# EAGLE board CT_schematic (EAGLE 7.6.0)

Size 100 x 80 mm. Coordinates in mm from the lower left corner, seen from the top.
Outline: 0,0 100,0 100,80 0,80 0,0
Copper layers (1*16): Top 0.035mm / dielectric 1.5mm / Bottom 0.035mm
Design rules "default": minimum track width 10mil, minimum drill 24mil, track to track 8mil, track to pad 8mil, pad to pad 8mil, via to via 8mil, smd to smd 8mil, copper to edge 40mil, drill to drill 8mil, minimum pad ring 10mil, minimum via ring 8mil, stop-mask expansion 4mil, vias tented up to drill 0mil, thermal gap 10mil

## Footprints (pad centres in the part's own frame; a part is rotated, then mirrored left to right if it is on the bottom)
C0603 = smd 0.8 x 0.8: 1 -0.762,0; 2 0.762,0
C0402 = smd 0.5 x 0.5: 1 -0.508,0; 2 0.508,0
C1210 = smd 1.2 x 2.5: 1 -1.524,0; 2 1.524,0
C0805 = smd 1.2 x 1.3: 1 -1.016,0; 2 1.016,0
C1206 = smd 1.3 x 1.6: 1 -1.524,0; 2 1.524,0
L0806 = smd 1.016 x 1.524: 1 -0.889,0; 2 0.889,0
R0603 = smd 0.8 x 0.8: 1 -0.762,0; 2 0.762,0
UFBGA64 = smd 0.2 x 0.2: A1 -1.75,1.75; A2 -1.25,1.75; A3 -0.75,1.75; A4 -0.25,1.75; A5 0.25,1.75; A6 0.75,1.75; A7 1.25,1.75; A8 1.75,1.75; B1 -1.75,1.25; B2 -1.25,1.25; B3 -0.75,1.25; B4 -0.25,1.25; B5 0.25,1.25; B6 0.75,1.25; B7 1.25,1.25; B8 1.75,1.25; C1 -1.75,0.75; C2 -1.25,0.75; C3 -0.75,0.75; C4 -0.25,0.75; C5 0.25,0.75; C6 0.75,0.75; C7 1.25,0.75; C8 1.75,0.75; D1 -1.75,0.25; D2 -1.25,0.25; D3 -0.75,0.25; D4 -0.25,0.25; D5 0.25,0.25; D6 0.75,0.25; D7 1.25,0.25; D8 1.75,0.25; E1 -1.75,-0.25; E2 -1.25,-0.25; E3 -0.75,-0.25; E4 -0.25,-0.25; E5 0.25,-0.25; E6 0.75,-0.25; E7 1.25,-0.25; E8 1.75,-0.25; F1 -1.75,-0.75; F2 -1.25,-0.75; F3 -0.75,-0.75; F4 -0.25,-0.75; F5 0.25,-0.75; F6 0.75,-0.75; F7 1.25,-0.75; F8 1.75,-0.75; G1 -1.75,-1.25; G2 -1.25,-1.25; G3 -0.75,-1.25; G4 -0.25,-1.25; G5 0.25,-1.25; G6 0.75,-1.25; G7 1.25,-1.25; G8 1.75,-1.25; H1 -1.75,-1.75; H2 -1.25,-1.75; H3 -0.75,-1.75; H4 -0.25,-1.75; H5 0.25,-1.75; H6 0.75,-1.75; H7 1.25,-1.75; H8 1.75,-1.75
TFBGA-153 = smd 0.3 x 0.3: A1 -3.25,3.25; A2 -2.75,3.25; A3 -2.25,3.25; A4 -1.75,3.25; A5 -1.25,3.25; A6 -0.75,3.25; A7 -0.25,3.25; A8 0.25,3.25; A9 0.75,3.25; A10 1.25,3.25; A11 1.75,3.25; A12 2.25,3.25; A13 2.75,3.25; A14 3.25,3.25; B1 -3.25,2.75; B2 -2.75,2.75; B3 -2.25,2.75; B4 -1.75,2.75; B5 -1.25,2.75; B6 -0.75,2.75; B7 -0.25,2.75; B8 0.25,2.75; B9 0.75,2.75; B10 1.25,2.75; B11 1.75,2.75; B12 2.25,2.75; B13 2.75,2.75; B14 3.25,2.75; C1 -3.25,2.25; C2 -2.75,2.25; C3 -2.25,2.25; C4 -1.75,2.25; C5 -1.25,2.25; C6 -0.75,2.25; C7 -0.25,2.25; C8 0.25,2.25; C9 0.75,2.25; C10 1.25,2.25; C11 1.75,2.25; C12 2.25,2.25; C13 2.75,2.25; C14 3.25,2.25; D1 -3.25,1.75; D2 -2.75,1.75; D3 -2.25,1.75; D4 -1.75,1.75; D12 2.25,1.75; D13 2.75,1.75; D14 3.25,1.75; E1 -3.25,1.25; E2 -2.75,1.25; E3 -2.25,1.25; E5 -1.25,1.25; E6 -0.75,1.25; E7 -0.25,1.25; E8 0.25,1.25; E9 0.75,1.25; E10 1.25,1.25; E12 2.25,1.25; E13 2.75,1.25; E14 3.25,1.25; F1 -3.25,0.75; F2 -2.75,0.75; F3 -2.25,0.75; F5 -1.25,0.75; F10 1.25,0.75; F12 2.25,0.75; F13 2.75,0.75; F14 3.25,0.75; G1 -3.25,0.25; G2 -2.75,0.25; G3 -2.25,0.25; G5 -1.25,0.25; G10 1.25,0.25; G12 2.25,0.25; G13 2.75,0.25; G14 3.25,0.25; H1 -3.25,-0.25; H2 -2.75,-0.25; H3 -2.25,-0.25; H5 -1.25,-0.25; H10 1.25,-0.25; H12 2.25,-0.25; H13 2.75,-0.25; H14 3.25,-0.25; J1 -3.25,-0.75; J2 -2.75,-0.75; J3 -2.25,-0.75; J5 -1.25,-0.75; J10 1.25,-0.75; J12 2.25,-0.75; J13 2.75,-0.75; J14 3.25,-0.75; K1 -3.25,-1.25; K2 -2.75,-1.25; K3 -2.25,-1.25; K5 -1.25,-1.25; K6 -0.75,-1.25; K7 -0.25,-1.25; K8 0.25,-1.25; K9 0.75,-1.25; K10 1.25,-1.25; K12 2.25,-1.25; K13 2.75,-1.25; K14 3.25,-1.25; L1 -3.25,-1.75; L2 -2.75,-1.75; L3 -2.25,-1.75; L12 2.25,-1.75; L13 2.75,-1.75; L14 3.25,-1.75; M1 -3.25,-2.25; M2 -2.75,-2.25; M3 -2.25,-2.25; M4 -1.75,-2.25; M5 -1.25,-2.25; M6 -0.75,-2.25; M7 -0.25,-2.25; M8 0.25,-2.25; M9 0.75,-2.25; M10 1.25,-2.25; M11 1.75,-2.25; M12 2.25,-2.25; M13 2.75,-2.25; M14 3.25,-2.25; N1 -3.25,-2.75; N2 -2.75,-2.75; N3 -2.25,-2.75; N4 -1.75,-2.75; N5 -1.25,-2.75; N6 -0.75,-2.75; N7 -0.25,-2.75; N8 0.25,-2.75; N9 0.75,-2.75; N10 1.25,-2.75; N11 1.75,-2.75; N12 2.25,-2.75; N13 2.75,-2.75; N14 3.25,-2.75; P1 -3.25,-3.25; P2 -2.75,-3.25; P3 -2.25,-3.25; P4 -1.75,-3.25; P5 -1.25,-3.25; P6 -0.75,-3.25; P7 -0.25,-3.25; P8 0.25,-3.25; P9 0.75,-3.25; P10 1.25,-3.25; P11 1.75,-3.25; P12 2.25,-3.25; P13 2.75,-3.25; P14 3.25,-3.25
SMD-8 = smd 0.72 x 0.6: 1 -1.45,-0.7; 2 -0.485,-0.7; 3 0.485,-0.7; 4 1.455,-0.7; 5 1.455,0.7; 6 0.485,0.7; 7 -0.485,0.7; 8 -1.455,0.7
QFN-28 = smd 0.813 x 0.305: 1 -2.451,1.5; 2 -2.451,1; 3 -2.451,0.5; 4 -2.451,0; 5 -2.451,-0.5; 6 -2.451,-1; 7 -2.451,-1.5; 15 2.451,-1.5; 16 2.451,-1; 17 2.451,-0.5; 18 2.451,0; 19 2.451,0.5; 20 2.451,1; 21 2.451,1.5 | smd 0.305 x 0.813: 8 -1.5,-2.451; 9 -1,-2.451; 10 -0.5,-2.451; 11 0,-2.451; 12 0.5,-2.451; 13 1,-2.451; 14 1.5,-2.451; 22 1.5,2.451; 23 1,2.451; 24 0.5,2.451; 25 0,2.451; 26 -0.5,2.451; 27 -1,2.451; 28 -1.5,2.451 | smd 3.607 x 3.607: 29 0,0
SJ-43515TS-SMT-TR = smd 2.2 x 3: 1 0.6,-7.4; 4 3.4,-7.4 | smd 3 x 3: 2 12.8,-7.4; 5 17,-3 | smd 2 x 3: 3 5.3,0; 6 2.5,0 | drill 1.8: P$7 4.5,-3.69; P$8 11.54,-3.69
ABLS-12.288MHZ-B4-T = smd 5.6 x 2.8: 1 -3.81,0; 2 5.69,0
ASEK = smd 1.4 x 1: 1 -1.1,-0.8; 2 1.1,-0.8; 3 1.1,0.8; 4 -1.1,0.8
ASFL1 = smd 1.7 x 1.5: 1 -1.27,-1.1; 2 1.27,-1.1; 3 1.27,1.1; 4 -1.27,1.1
TSOT-23-5 = smd 1.3 x 0.62: 1 -1.31,0.95; 2 -1.31,0; 3 -1.31,-0.95; 4 1.31,-0.95; 5 1.31,0.95
DFN8_2X3MC = smd 0.813 x 0.305: 1 -1.398,0.75; 2 -1.398,0.25; 3 -1.398,-0.25; 4 -1.398,-0.75; 5 1.398,-0.75; 6 1.398,-0.25; 7 1.398,0.25; 8 1.398,0.75 | smd 1.753 x 1.549: 9 0,0
JST-2-SMD = smd 1 x 4.6: 1 -1,-3.7; 2 1,-3.7 | smd 1.6 x 3.4: NC1 -3.4,1.5; NC2 3.4,1.5
FCI_10118193-0001LF = smd 0.4 x 1.35: 1 -1.3,2.675; 2 -0.65,2.675; 3 0,2.675; 4 0.65,2.675; 5 1.3,2.675 | smd 1.6 x 1.4: 6 -3.2,2.45; 7 3.2,2.45 | smd 1.9 x 1.9: 8 -1.2,0; 9 1.2,0 | hole 0.5: -3.3,0; 3.3,0
SON-6 = smd 0.55 x 0.3: 1 -0.355,0.5 | smd 0.52 x 0.3: 2 -0.37,0; 3 -0.37,-0.5; 4 0.37,-0.5; 5 0.37,0; 6 0.37,0.5
SW_4-1437565-2 = smd 1.4 x 2.1: 1 -2.23,4.55; 2 -2.23,-4.55; 3 2.23,4.55; 4 2.23,-4.55
LGM67K-G1J2-24-Z = smd 0.8 x 1.4: A -2,0; C 0,0
NC7SZ125M5X = smd 1.3 x 0.7: 1 -1.3,0.95; 2 -1.3,0; 3 -1.3,-0.95; 4 1.3,-0.95; 5 1.3,0.95
DUMMY_PACKAGE_207 = drill 0.3: 1 0,-1; 2 1.5,-1; 3 3,-1

## Placement (x,y rotation side)
C1  1e-06  [C0603]  -30.48,68.58 0 top  (outside the outline)
C2  1e-07  [C0603]  -34.29,68.58 0 top  (outside the outline)
C3  1e-07  [C0603]  -38.1,68.58 0 top  (outside the outline)
C4  1e-07  [C0603]  -41.91,68.58 0 top  (outside the outline)
C5  1e-07  [C0603]  -45.72,68.58 0 top  (outside the outline)
C6  1e-07  [C0603]  -49.53,68.58 0 top  (outside the outline)
C7  4.7e-06  [C0603]  -15.24,68.58 0 top  (outside the outline)
C8  1e-08  [C0603]  -53.34,68.58 0 top  (outside the outline)
C9  1e-06  [C0603]  -57.15,68.58 0 top  (outside the outline)
C10  1e-07  [C0402]  -50.8,73.66 0 top  (outside the outline)
C11  2.2e-06  [C0603]  -19.05,68.58 0 top  (outside the outline)
C12  2.2e-06  [C0603]  -22.86,68.58 0 top  (outside the outline)
C13  1e-07  [C0402]  -54.61,73.66 0 top  (outside the outline)
C14  1e-07  [C0402]  -58.42,73.66 0 top  (outside the outline)
C15  2.2e-06  [C0603]  -26.67,68.58 0 top  (outside the outline)
C16  1e-06  [C0603]  -60.96,68.58 0 top  (outside the outline)
C17  1e-06  [C0603]  -64.77,68.58 0 top  (outside the outline)
C18  2.2e-05  [C1210]  -57.15,44.45 0 top  (outside the outline)
C19  2.2e-05  [C1210]  -63.5,44.45 0 top  (outside the outline)
C20  1e-09  [C0402]  -62.23,73.66 0 top  (outside the outline)
C21  1e-09  [C0402]  -66.04,73.66 0 top  (outside the outline)
C22  1e-07  [C0402]  -69.85,73.66 0 top  (outside the outline)
C23  1e-07  [C0402]  -73.66,73.66 0 top  (outside the outline)
C24  1e-07  [C0402]  -15.24,78.74 0 top  (outside the outline)
C25  1e-07  [C0402]  -19.05,78.74 0 top  (outside the outline)
C26  1e-07  [C0402]  -22.86,78.74 0 top  (outside the outline)
C27  1e-05  [C0805]  -46.99,52.07 0 top  (outside the outline)
C28  1e-05  [C0805]  -52.07,52.07 0 top  (outside the outline)
C29  1e-05  [C0805]  -57.15,52.07 0 top  (outside the outline)
C30  1e-05  [C0805]  -62.23,52.07 0 top  (outside the outline)
C31  1e-05  [C0805]  -67.31,52.07 0 top  (outside the outline)
C32  2.2e-11  [C0402]  -43.18,73.66 0 top  (outside the outline)
C33  2.2e-11  [C0402]  -46.99,73.66 0 top  (outside the outline)
C34  1e-08  [C0402]  -26.67,78.74 0 top  (outside the outline)
C35  1e-08  [C0402]  -30.48,78.74 0 top  (outside the outline)
C36  1e-05  [C0805]  -72.39,52.07 0 top  (outside the outline)
C37  1e-05  [C0805]  -15.24,58.42 0 top  (outside the outline)
C38  1e-07  [C0402]  -34.29,78.74 0 top  (outside the outline)
C39  1e-05  [C1206]  -69.85,44.45 0 top  (outside the outline)
C40  1e-05  [C1206]  -16.51,52.07 0 top  (outside the outline)
C41  1e-08  [C0402]  -38.1,78.74 0 top  (outside the outline)
C42  1e-08  [C0402]  -41.91,78.74 0 top  (outside the outline)
I1  3.3e-06  [L0806]  -22.86,52.07 0 top  (outside the outline)
R2  1000.0  [R0603]  -68.58,68.58 0 top  (outside the outline)
R4  4700.0  [R0603]  -72.39,68.58 0 top  (outside the outline)
R5  4700.0  [R0603]  -15.24,73.66 0 top  (outside the outline)
R6  2200.0  [R0603]  -19.05,73.66 0 top  (outside the outline)
R7  2200.0  [R0603]  -22.86,73.66 0 top  (outside the outline)
R8  10000.0  [R0603]  -48.26,58.42 0 top  (outside the outline)
R9  34000.0  [R0603]  -53.34,58.42 0 top  (outside the outline)
R10  34000.0  [R0603]  -58.42,58.42 0 top  (outside the outline)
R11  34000.0  [R0603]  -63.5,58.42 0 top  (outside the outline)
R12  34000.0  [R0603]  -68.58,58.42 0 top  (outside the outline)
R13  34000.0  [R0603]  -73.66,58.42 0 top  (outside the outline)
R14  34000.0  [R0603]  -15.24,63.5 0 top  (outside the outline)
R15  34000.0  [R0603]  -20.32,63.5 0 top  (outside the outline)
R16  34000.0  [R0603]  -25.4,63.5 0 top  (outside the outline)
R17  34000.0  [R0603]  -30.48,63.5 0 top  (outside the outline)
R18  34000.0  [R0603]  -35.56,63.5 0 top  (outside the outline)
R19  10000.0  [R0603]  -40.64,63.5 0 top  (outside the outline)
R20  22.0  [R0603]  -26.67,73.66 0 top  (outside the outline)
R21  47000.0  [R0603]  -45.72,63.5 0 top  (outside the outline)
R22  47000.0  [R0603]  -50.8,63.5 0 top  (outside the outline)
R23  47000.0  [R0603]  -55.88,63.5 0 top  (outside the outline)
R24  680.0  [R0603]  -30.48,73.66 0 top  (outside the outline)
R25  220000.0  [R0603]  -33.02,58.42 0 top  (outside the outline)
R26  1000000.0  [R0603]  -27.94,58.42 0 top  (outside the outline)
R27  10000.0  [R0603]  -60.96,63.5 0 top  (outside the outline)
R28  10000.0  [R0603]  -66.04,63.5 0 top  (outside the outline)
R29  9100.0  [R0603]  -34.29,73.66 0 top  (outside the outline)
R30  680000.0  [R0603]  -38.1,58.42 0 top  (outside the outline)
R31  120000.0  [R0603]  -43.18,58.42 0 top  (outside the outline)
R32  2000.0  [R0603]  -38.1,73.66 0 top  (outside the outline)
R33  10000.0  [R0603]  -71.12,63.5 0 top  (outside the outline)
U1  STM32L431RBI6  [UFBGA64]  -24.13,36.83 0 top  (outside the outline)
U2  mtfc4gmcdm  [TFBGA-153]  -20.32,8.89 0 top  (outside the outline)
U3  TMD27711  [SMD-8]  -41.91,52.07 0 top  (outside the outline)
U4  WM8731CLSEFL  [QFN-28]  -49.53,45.72 0 top  (outside the outline)
U5  SJ-43515TS-SMT-TR  [SJ-43515TS-SMT-TR]  -53.34,10.16 0 top  (outside the outline)
U6  SJ-43515TS-SMT-TR  [SJ-43515TS-SMT-TR]  -39.37,26.67 0 top  (outside the outline)
U7  ABLS-12.288MHZ-B4-T  [ABLS-12.288MHZ-B4-T]  -25.4,45.72 0 top  (outside the outline)
U8  ASEK-32.768KHz-ECST  [ASEK]  -72.39,35.56 0 top  (outside the outline)
U9  ASFL1-25MHZ-NCS  [ASFL1]  -41.91,36.83 0 top  (outside the outline)
U10  ltc3406es5  [TSOT-23-5]  -20.32,57.15 0 top  (outside the outline)
U11  MCP73831T-2ACI/MC  [DFN8_2X3MC]  -57.15,77.47 0 top  (outside the outline)
U12  S2B-PH-SM4-TB(LF)(SN)  [JST-2-SMD]  -69.85,24.13 0 top  (outside the outline)
U13  10118193-0001LF  [FCI_10118193-0001LF]  -50.8,35.56 0 top  (outside the outline)
U14  TPS3895ADRYR  [SON-6]  -50.8,77.47 0 top  (outside the outline)
U15  4-1437565-2  [SW_4-1437565-2]  -55.88,24.13 0 top  (outside the outline)
U16  Q65110A2395  [LGM67K-G1J2-24-Z]  -36.83,44.45 0 top  (outside the outline)
U17  nc7sz125m5x  [NC7SZ125M5X]  -27.94,52.07 0 top  (outside the outline)
U18  nc7sz125m5x  [NC7SZ125M5X]  -34.29,52.07 0 top  (outside the outline)
U19  Dummy  [DUMMY_PACKAGE_207]  -48.26,78.74 0 top  (outside the outline)

## Library data of the parts
C1-C42 I1 R2 R4-R33 U1-U19 = circuit_tree

## Nets
CLK_CRYSTAL_U4_1: C32.1 U4.1 U7.1
CLK_CRYSTAL_U4_2: C33.1 U4.2 U7.2
CLK_U1_A1: U1.A1 U8.3
CLK_U1_C1: U1.C1 U9.3
GND: C1.2 C2.2 C3.2 C4.2 C5.2 C6.2 C7.2 C8.2 C9.2 C10.2 C11.2 C12.2 C13.2 C14.2 C15.2 C16.2 C17.2 C21.2 C22.2 C23.2 C24.2 C25.2 C26.2 C27.2 C28.2 C29.2 C30.2 C31.2 C32.2 C33.2 C34.2 C35.2 C36.2 C37.1 C37.2 C38.2 C39.2 C40.2 C41.2 C42.2 R2.2 R8.2 R21.2 R22.2 R23.2 R25.2 R29.2 R31.2 R32.2 U1.C2 U1.D4 U1.D5 U1.D6 U1.F1 U2.C4 U2.E7 U2.G5 U2.H10 U2.K8 U2.N2 U2.N5 U2.P4 U2.P6 U3.3 U4.4 U4.15 U4.19 U4.25 U4.26 U4.29 U5.1 U6.1 U8.2 U9.2 U10.2 U11.6 U11.9 U12.2 U13.5 U13.6 U13.7 U13.8 U13.9 U14.2 U16.C U17.1 U17.3 U18.1 U18.3 U19.1
INPUT_USBPOWER_5V: C39.1 R33.2 U11.1 U11.2 U13.1
NET_U1_B4: R8.1 U1.B4
NET_U1_C3: R7.1 U1.C3 U3.8
NET_U1_C7: R6.1 U1.C7 U3.2
NET_U1_E1: R5.1 U1.E1 U18.4
NET_U1_H6: U16.A
NET_U1_H7: U15.3 U15.4
NET_U2_C2: C12.1 C13.1 U2.C2
NET_U2_K5: R4.1 U2.K5 U17.4
NET_U3_4: C17.1 R20.1 U3.4
NET_U3_5: U3.5
NET_U3_6: U3.6
NET_U3_7: R19.1 U3.7
NET_U4_9: U4.9
NET_U4_20: C26.1 C31.1 U4.20
NET_U5_2: C19.1 R22.1 U5.2
NET_U5_5: C18.1 R21.1 U5.5
NET_U5_13: C18.2
NET_U5_14: C19.2
NET_U6_5: C20.1 C21.1 R23.1 R24.1 U6.5
NET_U6_21: R24.2
NET_U6_22: C20.2
NET_U10_1: U10.1
NET_U10_3: I1.1 U10.3
NET_U10_5: R25.1 R26.1 U10.5
NET_U10_ATNET_3: I1.2 R26.2
NET_U11_5: R33.1 U11.5
NET_U11_8: R32.1 U11.8
NET_U14_1: R28.1 R29.1 U14.1
NET_U14_3: R30.2 R31.1 U14.3
NET_U14_4: R27.1 U14.4 U17.2 U18.2
NET_U15_1: R2.1 U15.1 U15.2
PROC_ADC1_IN1: U1.E3 U19.3
PROC_ADC1_IN2: U1.E2 U19.2
PROC_SAI1_FS_A: U1.H8 U4.9 U4.11
PROC_SAI1_SCK_A: U1.D7 U4.7
PROC_SAI1_SD_A: U1.C6 U4.8
PROC_SDMMC1_CK: R18.1 U1.C5 U2.M6
PROC_SDMMC1_CMD: R17.1 U1.B5 U2.M5
PROC_SDMMC1_D0: R9.1 U1.E8 U2.A3
PROC_SDMMC1_D1: R10.1 U1.D8 U2.A4
PROC_SDMMC1_D2: R11.1 U1.B7 U2.A5
PROC_SDMMC1_D3: R12.1 U1.B6 U2.B2
PROC_SDMMC1_D4: R13.1 U1.B3 U2.B3
PROC_SDMMC1_D5: R14.1 U1.A3 U2.B4
PROC_SDMMC1_D6: R15.1 U1.F6 U2.B5
PROC_SDMMC1_D7: R16.1 U1.E7 U2.B6
VCC_S1_3V7: C36.1 C40.1 U10.4 U11.3 U11.4 U12.1
VCC_TIER1_3V3: C1.1 C2.1 C3.1 C4.1 C5.1 C6.1 C7.1 C8.1 C9.1 C10.1 C11.1 C14.1 C15.1 C16.1 C22.1 C23.1 C24.1 C25.1 C27.1 C28.1 C29.1 C30.1 C34.1 C35.1 C37.2 C38.1 C41.1 C42.1 I1.2 R4.2 R5.2 R6.2 R7.2 R9.2 R10.2 R11.2 R12.2 R13.2 R14.2 R15.2 R16.2 R17.2 R18.2 R19.2 R20.2 R26.2 R27.2 R28.2 R30.1 U1.B2 U1.D2 U1.E4 U1.E5 U1.E6 U1.H1 U2.C6 U2.E6 U2.F5 U2.J10 U2.K9 U2.M4 U2.N4 U2.P3 U2.P5 U3.1 U4.3 U4.5 U4.12 U4.18 U8.4 U9.4 U14.6 U17.5 U18.5

## Tracks (layer width: path | path; a pad name or v marks a point on that pad's centre or on a via)
CLK_CRYSTAL_U4_1  (2 unrouted)
CLK_CRYSTAL_U4_2  (2 unrouted)
CLK_U1_A1  (1 unrouted)
CLK_U1_C1  (1 unrouted)
GND  (89 unrouted)
INPUT_USBPOWER_5V  (4 unrouted)
NET_U1_B4  (1 unrouted)
NET_U1_C3  (2 unrouted)
NET_U1_C7  (2 unrouted)
NET_U1_E1  (2 unrouted)
NET_U1_H7  (1 unrouted)
NET_U2_C2  (2 unrouted)
NET_U2_K5  (2 unrouted)
NET_U3_4  (2 unrouted)
NET_U3_7  (1 unrouted)
NET_U4_20  (2 unrouted)
NET_U5_2  (2 unrouted)
NET_U5_5  (2 unrouted)
NET_U6_5  (4 unrouted)
NET_U10_3  (1 unrouted)
NET_U10_5  (2 unrouted)
NET_U10_ATNET_3  (1 unrouted)
NET_U11_5  (1 unrouted)
NET_U11_8  (1 unrouted)
NET_U14_1  (2 unrouted)
NET_U14_3  (2 unrouted)
NET_U14_4  (3 unrouted)
NET_U15_1  (2 unrouted)
PROC_ADC1_IN1  (1 unrouted)
PROC_ADC1_IN2  (1 unrouted)
PROC_SAI1_FS_A  (2 unrouted)
PROC_SAI1_SCK_A  (1 unrouted)
PROC_SAI1_SD_A  (1 unrouted)
PROC_SDMMC1_CK  (2 unrouted)
PROC_SDMMC1_CMD  (2 unrouted)
PROC_SDMMC1_D0  (2 unrouted)
PROC_SDMMC1_D1  (2 unrouted)
PROC_SDMMC1_D2  (2 unrouted)
PROC_SDMMC1_D3  (2 unrouted)
PROC_SDMMC1_D4  (2 unrouted)
PROC_SDMMC1_D5  (2 unrouted)
PROC_SDMMC1_D6  (2 unrouted)
PROC_SDMMC1_D7  (2 unrouted)
VCC_S1_3V7  (5 unrouted)
VCC_TIER1_3V3  (73 unrouted)